# Altium PCB PCB1.PcbDoc
Units mil, origin at the board's own origin, x right, y up, seen from the top; angles counter-clockwise.
Board outline 445 x 490 mil, 2 copper layers (Top Layer, Bottom Layer), stack 30.696 mil thick; 11 components, 8 nets, 74 pads, 43 vias.
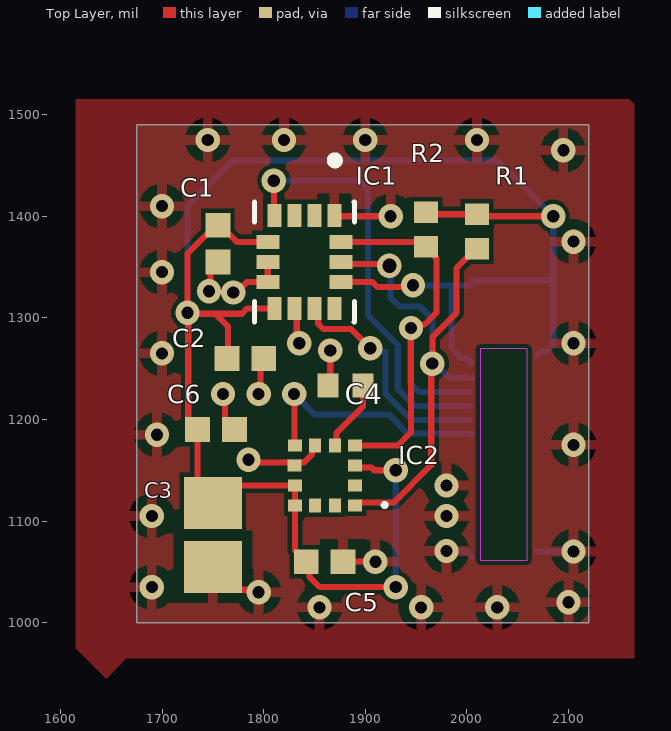
[diagram p0: Top Layer view]
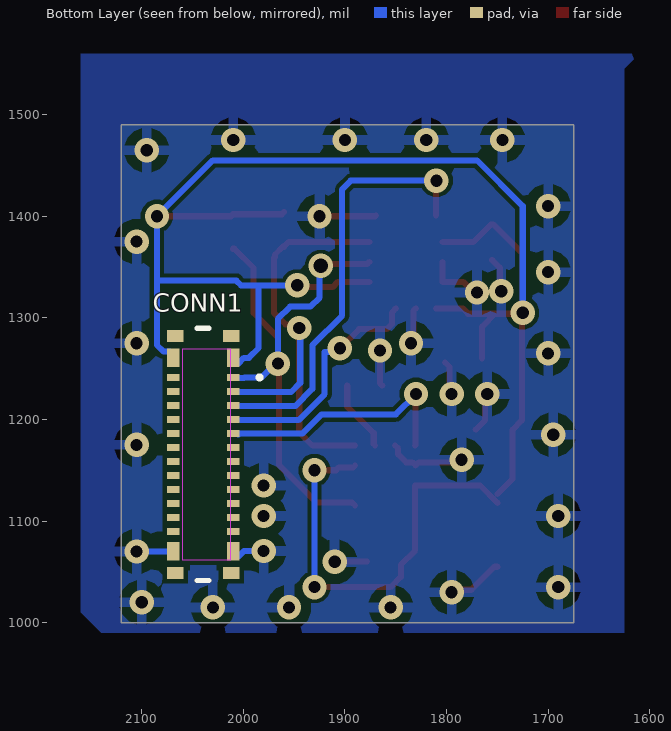
[diagram p1: Bottom Layer view, seen from below]
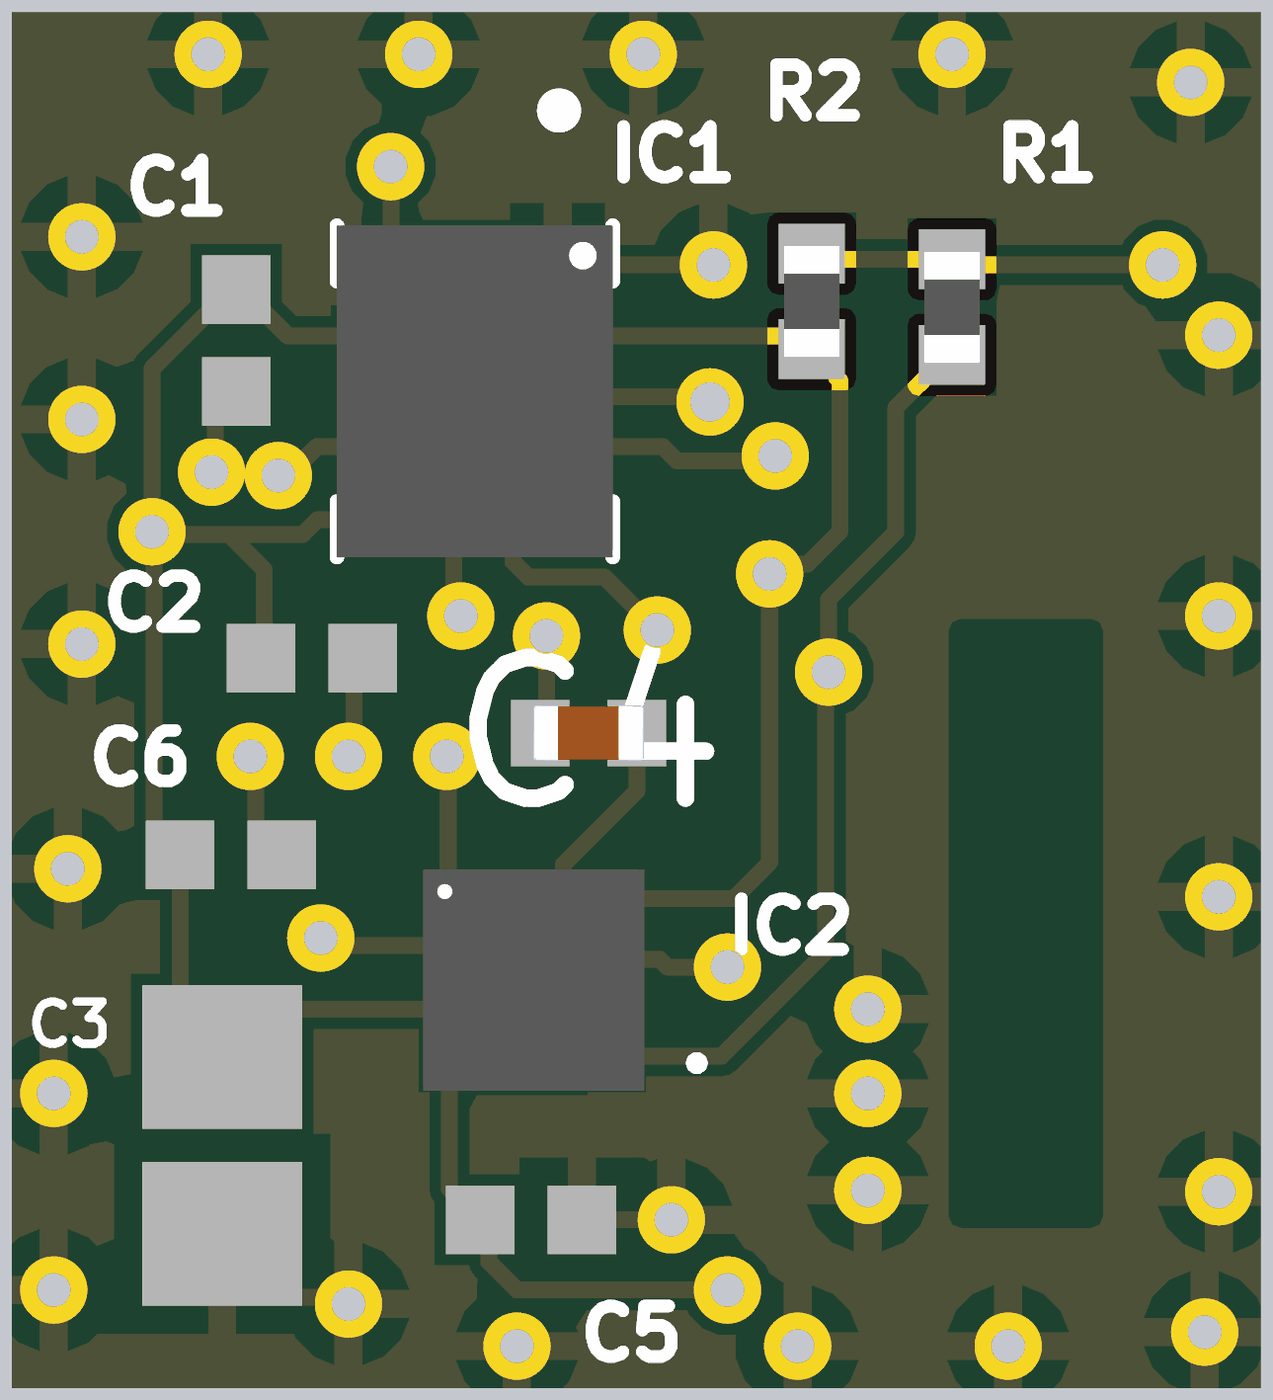
[diagram p2: 3D render of the assembled board from above, using the file's embedded part models]

## Layer stack, top to bottom
Top Solder: solder mask 0.4, Solder Resist, Dk 3.5
Top Layer: signal copper 1.4
Dielectric 1: dielectric 27.8961, FR-4, Dk 4.8
Bottom Layer: signal copper 1.4
Bottom Solder: solder mask 0.4, Solder Resist, Dk 3.5

## Board outline
1675,1000 2120,1000 2120,1490 1675,1490

## Design rules (kind name [scope] priority, off if disabled: settings)
Clearance [All] p1: gap=4 ignorepadtopadclearanceinfootprint=FALSE
MinimumSolderMaskSliver [All] p1: minsoldermaskwidth=4
PolygonConnect [All] p1: connectstyle=Relief reliefconductorwidth=10 reliefentries=4 polygonreliefangle="90 Angle" airgapwidth=10
RoutingVias [All] p1: holewidth=28 width=50 viastyle="Through Hole" minholewidth=28 minwidth=50 maxholewidth=28 maxwidth=50
SolderMaskExpansion [All] p1: expansion=0 istentingtop=FALSE
SupplyNets "Schematic Supply Nets_1" [InNet('GND')] p1: voltage=0.000
SupplyNets "Schematic Supply Nets" [InNet('1V8')] p2: voltage=0.000
Width [All] p1: maxlimit=10 minlimit=6 preferedwidth=6 minimp=50.000000 maximp=50.000000 favimp=50.000000
29 further rules are at their usual default settings.

## Components (designator, comment, footprint, x,y, rotation, side; value= is the part's Value field where it differs from the comment)
C1 "VJ0402G104KXQCW1BC" "C100nF - VJ0402G104KXQCW1BC" 1755,1373.11 r270 top
C2 "VJ0402G104KXQCW1BC" "C100nF - VJ0402G104KXQCW1BC" 1781.93,1260 r0 top
C3 "CC0805KRX5R6BB106" "C10uf - CC0805KRX5R6BB106" 1750,1086.5 r270 top
C4 "CGA2B3X7R1E224K050BE" CAPC1005X60N 1880.51,1233.31 r0 top
C5 "VJ0402G104KXQCW1BC" "C100nF - VJ0402G104KXQCW1BC" 1860,1060 r180 top
C6 "VJ0402G104KXQCW1BC" "C100nF - VJ0402G104KXQCW1BC" 1753.11,1190 r0 top
CONN1 "BM29B0.6-24DS/2-0.35V(51)" HRS_BM29B0.6-24DS/2-0.35V(51) 2039.53,1165.55 r90 bottom
IC1 "LSM6DSV16BXTR" PQFN50P250X300X74-14N 1840,1355 r270 top
IC2 "IIS2MDC" Magnetometer 1860.94,1145.31 r180 top
R1 "RE0402FRE0710KL" RESC1005X37N 2010,1385 r270 top
R2 "RE0402FRE0710KL" RESC1005X37N 1960,1387.01 r270 top

## Footprints (in the part's own frame and the unit in brackets; to place one, negate y for a bottom-side part, rotate by r counter-clockwise, add the part's x,y. Pads: shape width x height; smd on the part's side, far side on the other; paste and mask are expansions set on the pad)
"C10uf - CC0805KRX5R6BB106" [mm] "Chip Capacitor, 2-Leads, Body 2,00x1,25mm, IPC Medium Density"
  rect 1.3x1.45 smd: 1(-0.8,0) 2(0.8,0)
  body extent -1.1,-0.72 1.1,0.72, height 0.95
"C100nF - VJ0402G104KXQCW1BC" [mm] "Chip Capacitor, 2-Leads, Body 1,00x0,50mm, IPC Medium Density"
  rect 0.62x0.62 smd: 1(-0.46,0) 2(0.46,0)
  body extent -0.53,-0.28 0.53,0.27, height 0.55
CAPC1005X60N [mm]
  rect 0.53x0.6 smd: 1(-0.437,0) 2(0.437,0)
  body extent -0.5,-0.25 0.5,0.25, height 0.6
HRS_BM29B0.6-24DS/2-0.35V(51) [mm]
  rect 0.18x0.32 smd paste+0 mask+0.05: 1(1.925,-0.75) 2(1.925,0.75) 3(1.575,-0.75) 4(1.575,0.75) 5(1.225,-0.75) 6(1.225,0.75) 7(0.875,-0.75) 8(0.875,0.75) 9(0.525,-0.75) 10(0.525,0.75) 11(0.175,-0.75) 12(0.175,0.75) 13(-0.175,-0.75) 14(-0.175,0.75) 15(-0.525,-0.75) 16(-0.525,0.75) 17(-0.875,-0.75) 18(-0.875,0.75) 19(-1.225,-0.75) 20(-1.225,0.75) 21(-1.575,-0.75) 22(-1.575,0.75) 23(-1.925,-0.75) 24(-1.925,0.75)
  rect 0.46x0.32 smd paste+0 mask+0.05: P1_1(2.415,-0.75) P1_2(2.415,0.75) P2_1(-2.415,-0.75) P2_2(-2.415,0.75)
  rect 0.3x0.42 smd paste+0 mask+0.102: P1_3(2.965,-0.7) P1_4(2.965,0.7) P2_3(-2.965,-0.7) P2_4(-2.965,0.7)
  Keep-Out Layer region: 2.645,-0.672 -2.645,-0.672 -2.645,0.508 2.645,0.508
  silkscreen extent -3.16,-1.46 3.16,0.15, body extent -3.15,-0.75 3.16,0.75, height 0.57
Magnetometer [mm]
  rect 0.35x0.3 smd: 1(-0.738,0.762) 2(-0.738,0.262) 3(-0.738,-0.238) 4(-0.738,-0.738) 7(0.762,-0.738) 8(0.774,-0.242) 9(0.762,0.262) 10(0.762,0.762)
  rect 0.3x0.35 smd: 5(-0.238,-0.738) 6(0.262,-0.738) 11(0.262,0.762) 12(-0.238,0.762)
  silkscreen extent -1.53,0.7 -1.43,0.8, body extent -1,-1 1,1, height 0.7
PQFN50P250X300X74-14N [mm]
  rect 0.575x0.35 smd paste-1 mask+0.05: 1(-1.162,0.75) 2(-1.162,0.25) 3(-1.162,-0.25) 4(-1.162,-0.75) 8(1.162,-0.75) 9(1.162,-0.25) 10(1.162,0.25) 11(1.162,0.75)
  rect 0.35x0.575 smd paste-1 mask+0.05: 5(-0.5,-0.913) 6(0,-0.913) 7(0.5,-0.913) 12(0.5,0.913) 13(0,0.913) 14(-0.5,0.913)
  silkscreen extent -2.64,-1.25 1.5,1.25, body extent -1.5,-1.25 1.5,1.25, height 0.74
RESC1005X37N [mm]
  rect 0.54x0.6 smd paste+0 mask+0.102: 1(-0.432,0) 2(0.432,0)
  body extent -0.5,-0.25 0.5,0.25, height 0.37

## Part data
C3: library part "C 10uF", Supplier Part Number 1=1988126P, Supplier 1=RS
C4: "Cap Ceramic 0.22uF 25V X7R 10% Pad SMD 0402 Soft Termination 125C Automotive T/R", Package="1005 TDK", Check_prices=https://www.snapeda.com/parts/CGA2B3X7R1E224K050BE/TDK/view-part/?ref=eda, MF=TDK, MP=CGA2B3X7R1E224K050BE, SnapEDA_Link=https://www.snapeda.com/parts/CGA2B3X7R1E224K050BE/TDK/view-part/?ref=snap, Supplier 1=Farnell, Supplier Part Number 1=CGA2B3X7R1E224K050BE
C5 C6: library part "C 100nf", Supplier Part Number 1=6981047, Supplier 1="Future Electronics"
CONN1: "26 (24 + 2 Power) Position Connector Receptacle, Center Strip Contacts Surface Mount Gold", Package=None, Check_prices=https://www.snapeda.com/parts/BM29B0.6-24DS/2-0.35V(51)/Hirose/view-part/?ref=eda, MF="Hirose Connector", MP=BM29B0.6-24DS/2-0.35V(51), SnapEDA_Link=https://www.snapeda.com/parts/BM29B0.6-24DS/2-0.35V(51)/Hirose/view-part/?ref=snap
IC1: "Accelerometer, Gyroscope, Temperature, 6 Axis Sensor IÂ²C, I3Câ„ , SPI Output", Package="LGA-14 STMicroelectronics", Supplier Part Number 1=2615021, Check_prices=https://www.snapeda.com/parts/LSM6DSV16BXTR/STMicroelectronics/view-part/?ref=eda, MF=STMicroelectronics, MP=LSM6DSV16BXTR, SnapEDA_Link=https://www.snapeda.com/parts/LSM6DSV16BXTR/STMicroelectronics/view-part/?ref=snap, Supplier 1=RS
R1 R2: "10 kOhms Â±1% 0.063W, 1/16W Chip Resistor 0402 (1005 Metric) Moisture Resistant Thick Film", Package="1005 Yageo", Check_prices=https://www.snapeda.com/parts/RE0402FRE0710KL/Yageo/view-part/?ref=eda, MF=Yageo, MP=RE0402FRE0710KL, SnapEDA_Link=https://www.snapeda.com/parts/RE0402FRE0710KL/Yageo/view-part/?ref=snap
C1 C2: Supplier 1="Future Electronics", Supplier Part Number 1=VJ0402G104KXQCW1BC

## Via types
v1: diameter 24, hole 12, Top Layer to Bottom Layer, 42 vias
v2: diameter 24, hole 14, Top Layer to Bottom Layer, 1 vias

## Nets (pads, with @x,y where several pads share a name; then routed paths per layer and width w, separated by ;. In a path a pad name is that pad's centre, name@x,y a point inside that pad or via, vN(x,y) a via of type N, cw(c..) or ccw(c..) an arc to the next point about the centre after c; other vN are vias at no path point)
1V8: C1.1 C2.1 C3.1 C5.2 C6.1 CONN1.P1_1 CONN1.P1_2 IC1.5 IC1.8 IC1.12 IC2.3 IC2.9 IC2.10 R1.1 R2.1 | length 1991.7
  Top Layer w6: C3.1 1767.01,1135 IC2.9 IC2.10 1830.94,1070.94 1845,1056.89 1845,1045 1855,1035 v1(1930,1035) ; C3.1@1750,1126.5 1735,1141.5 C6.1 1725.8,1199.2 v1@1725.8,1304.2 ; C1.1@1755,1391.93 1753.82,1391.93 1725,1363.11 v1(1725,1305) v1@1725.8,1304.2 ; C1.1@1756.18,1391.93 1773.43,1374.68 IC1.5 ; C2.1@1765,1260 1765,1291.35 1752.35,1304 ; IC1.8 1783.93,1309.23 1778.7,1304 1752.35,1304 ; IC1.12 1906.97,1335.32 1912.07,1330.21 1945.21,1330.21 v1(1947,1332) ; IC2.3 1891.9,1152.79 1905.89,1152.79 1908.68,1150 v1(1930,1150) ; R2.1 1962.01,1402.01 R1.1 2012.01,1400 v1(2085,1400) ; v1@1725.8,1304.2 1726,1304 1752.35,1304
  Bottom Layer w6: v1(1725,1305) 1725,1410 1770,1455 2030,1455 v1(2085,1400) 2085,1336.65 ; v1(1930,1035) v1(1930,1150) ; v1(1947,1332) 1985,1332 ; CONN1.P1_1@2005,1255 1999.37,1260.63 1994.7,1260.63 1985,1270.33 1985,1332 ; CONN1.P1_2@2069.06,1263.39 2072.35,1266.68 2078.39,1266.68 2085,1273.3 2085,1336.65 ; 1985,1332 2002.3,1332 2006.95,1336.65 2085,1336.65
GND: C1.2 C2.2 C3.2 C4.1 C5.1 C6.2 CONN1.P2_1 CONN1.P2_2 IC1.1 IC1.6 IC1.7 IC1.9 IC2.6 IC2.8 | length 523.4
  Top Layer w6: v1(1746.21,1326.21) 1747.53,1327.53 1747.53,1349.42 C1.2@1755,1356.89 ; C3.2 1752.95,1055 1775.54,1032.41 1792.59,1032.41 v1(1795,1030) ; v1(1760,1225) 1762.02,1222.98 1762.02,1199.2 C6.2 ; v1(1770,1325) 1773.44,1325 1783.76,1335.32 IC1.7 IC1.6 ; v1(1785.13,1160.33) 1787.88,1157.59 1827.73,1157.59 IC2.8 1833.38,1157.75 1839.85,1157.75 1847.72,1165.63 1847.72,1171.46 IC2.6 ; v1(1795,1225) 1796.93,1226.93 1796.93,1251.62 C2.2@1801.5,1256.18 ; IC1.9 1832.58,1306.81 1832.58,1277.42 v1(1835,1275) ; C4.1 1865.51,1235.51 v1(1865.51,1267.91) ; IC1.1 1870.3,1400 v1(1925,1400) ; C5.1 v1(1910,1060)
  Bottom Layer w6: v1(1980,1070.47) 1999.53,1070.47 CONN1.P2_1@2005,1065 ; CONN1.P2_2 2069.53,1070 v1(2105,1070)
  other v1: 1855,1015 1955,1015 2030,1015 2100,1020 1690,1035 1690,1105 1980,1105 1980,1135 2105,1175 1695,1185 1700,1265 2105,1275 1700,1345 2105,1375 1700,1410 2095,1465 1745,1475 1820,1475 1900,1475 2010,1475
I2C3_SCL_1V8: CONN1.1 IC1.13 IC2.1 R1.2 | length 543.4
  Top Layer w6: IC1.13 1877.82,1353.11 1921.89,1353.11 v2(1923.79,1351.21) ; IC2.1 1892.91,1118.22 1927.92,1118.22 1965,1155.3 1965,1254 v1(1966,1255) 1966,1281 1990,1305 1990,1349.17 2008.82,1367.99 R1.2
  Bottom Layer w6: v2(1923.79,1351.21) 1925,1350 1925,1320 1934,1311 1954,1311 1966,1299 v1(1966,1255) 1968.38,1255 1982.04,1241.34 1998.66,1241.34 1999.33,1240.67 CONN1.1@2005,1240.67
I2C3_SDA_1V8: CONN1.3 IC1.14 IC2.4 R2.2 | length 467.7
  Top Layer w6: IC1.14 1955.31,1374.68 R2.2 1961.18,1370 1968.81,1362.37 1968.81,1360.04 1970,1358.86 1970,1305 1958.44,1293.44 1948.44,1293.44 v1(1945,1290) 1945,1187.29 1932.08,1174.37 IC2.4
  Bottom Layer w6: v1(1945,1290) 1944,1289 1944,1236 1953.07,1226.93 2003.44,1226.93
"MCU I/O 1": CONN1.5 IC1.4 | length 417.2
  Top Layer w6: v1(1810,1435) 1810.24,1434.76 1810.24,1401 IC1.4
  Bottom Layer w6: v1(1810,1435) 1894.27,1435 1902.79,1426.49 1902.79,1302.21 1932,1273 1932,1230 1948.85,1213.15 2002.9,1213.15
"MCU I/O 2": CONN1.7 IC1.10 | length 229.1
  Top Layer w6: IC1.10 1853.64,1305.44 1853.64,1294.19 1858.91,1288.91 1886.09,1288.91 v1(1905,1270)
  Bottom Layer w6: v1(1905,1270) 1908.44,1266.56 1919.93,1266.56 1920,1266.49 1920,1225 1945.62,1199.38 2002.5,1199.38
"MCU I/O 3": CONN1.9 IC2.7 | length 242.7
  Top Layer w6: v1(1830,1225) 1830.47,1224.53 1830.47,1174.84 IC2.7
  Bottom Layer w6: v1(1830,1225) 1850,1205 1923.03,1205 1941.96,1186.07 1942.11,1186.22 2003.78,1186.22 CONN1.9@2005,1185
NetC4_2: C4.2 IC2.5 | length 70.3
  Top Layer w6: IC2.5 1871.6,1175.66 1871.6,1186.6 1897.72,1212.72 C4.2
pads on no net: CONN1.2 CONN1.4 CONN1.6 CONN1.8 CONN1.10 CONN1.11 CONN1.12 CONN1.13 CONN1.14 CONN1.15 CONN1.16 CONN1.17 CONN1.18 CONN1.19 CONN1.20 CONN1.21 CONN1.22 CONN1.23 CONN1.24 CONN1.P1_3 CONN1.P1_4 CONN1.P2_3 CONN1.P2_4 IC1.2 IC1.3 IC1.11 IC2.2 IC2.11 IC2.12

## Polygon pours and split planes (outlines as drawn)
GND on Top Layer "GND_L01_P001" (solid, remove dead copper, pour order 1): 1615,1515 1615,975 1645,945 1665,965 2165,965 2165,1510 2160,1515
GND on Bottom Layer "GND_L02_P002" (solid, remove dead copper, pour order 2): 1610,1560 1625,1545 1625,990 2140,990 2160,1010 2160,1560